# Altium PCB SPEC_A7_Management.PCBDOC (part 2 of 4)
Units mm, origin at the board's own origin, x right, y up, seen from the top; angles counter-clockwise.
Board outline 141.1 x 65.84 mm, 4 copper layers (Top Layer, Layer 1, Layer 2, Bottom Layer), stack 1.566 mm thick; 177 components, 176 nets, 698 pads, 409 vias.
Unrouted connection lines stored in the file: 4.
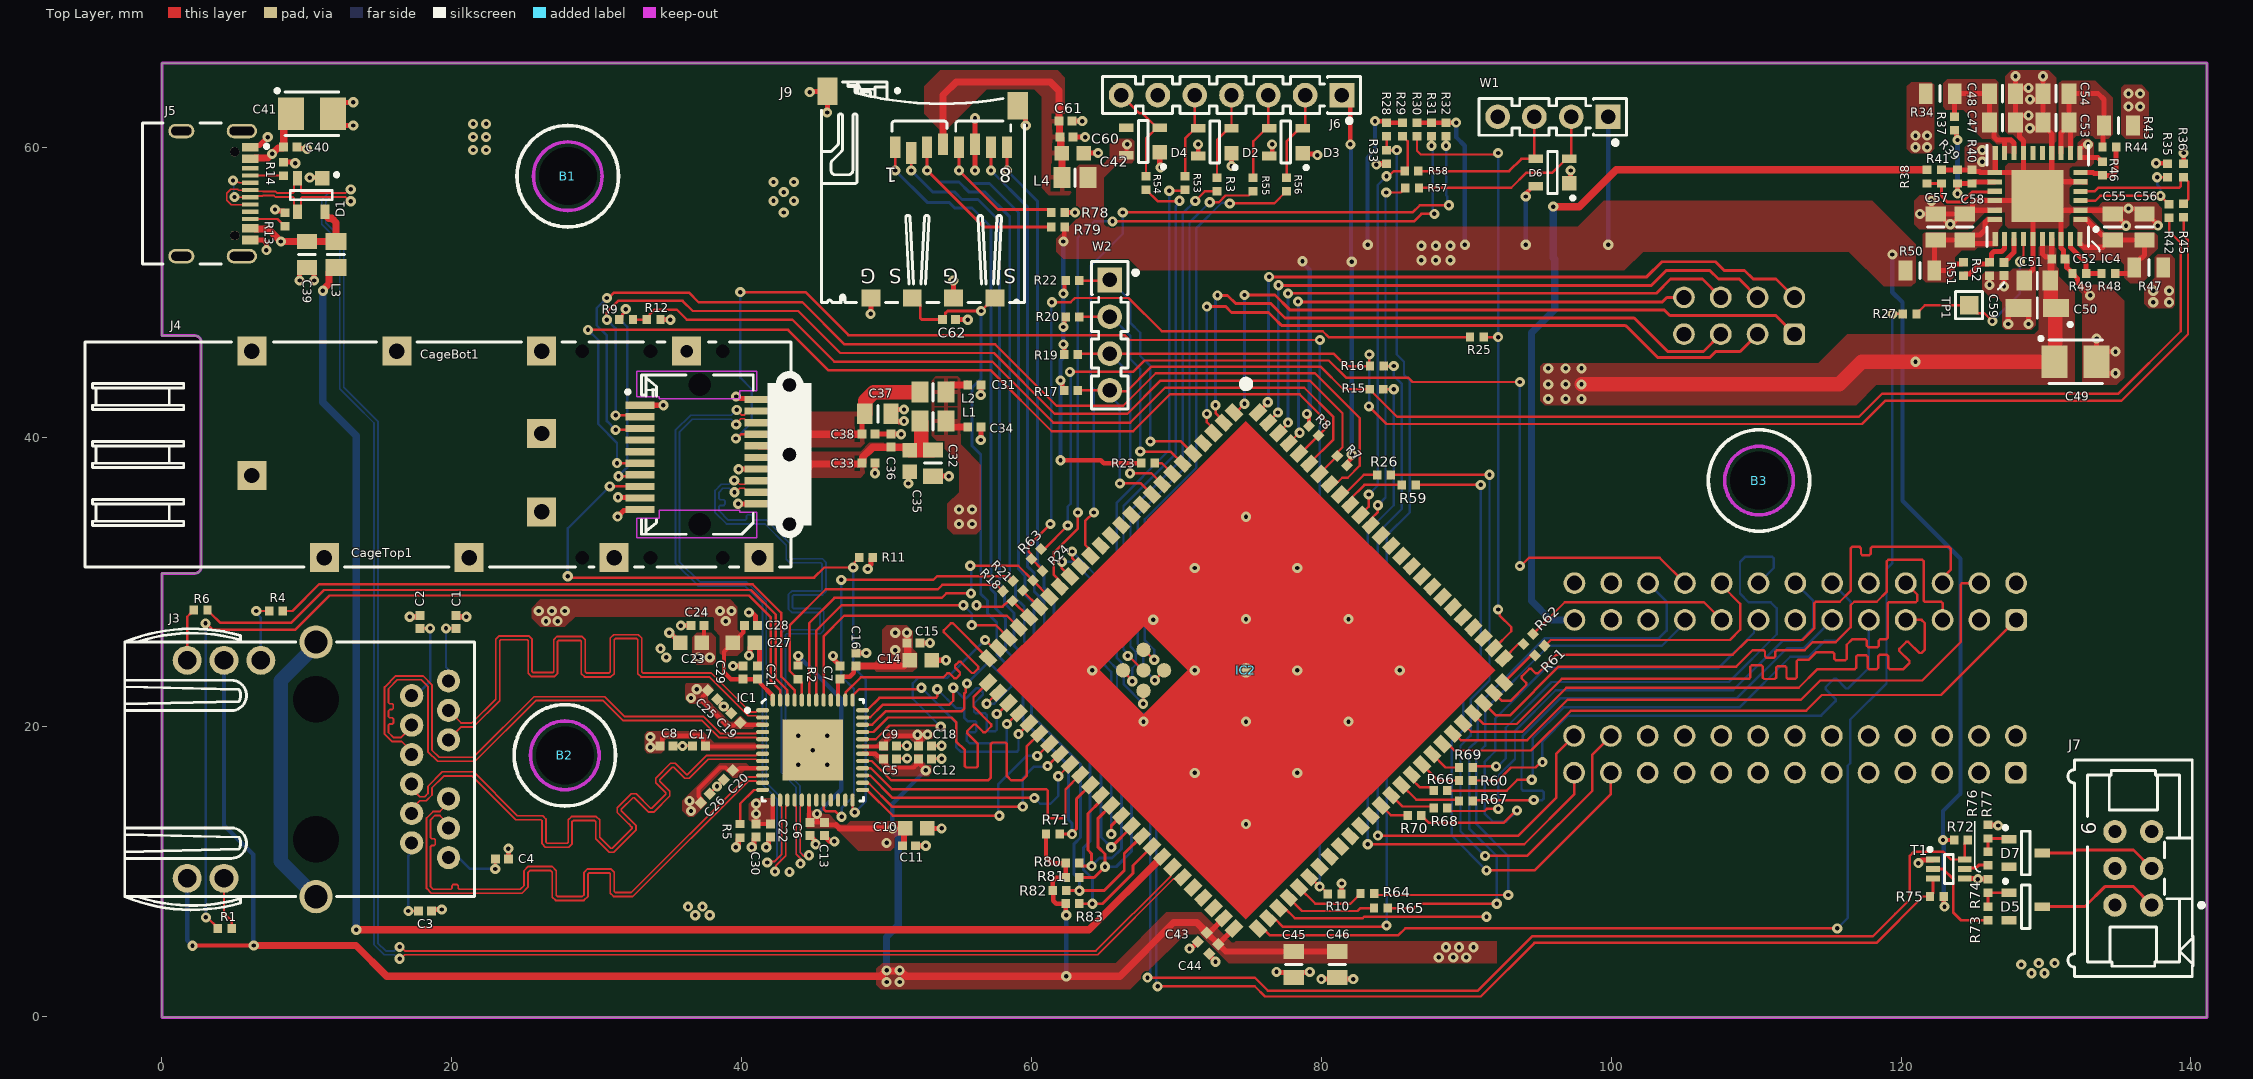
[diagram p0: Top Layer view]

## Part data (continued)
R39 R40 R48: library part R0402_24K_1%_0.0625W_100PPM, "Resistor - 1%", Case=0402, Manufacturer=GENERIC, Manufacturer1 ComponentHeight=0.4mm, Manufacturer1 Example="YAGEO PHYCOMP", Manufacturer1 Part Number=232270672403L, Power=0.0625W, Tolerance=±1%, Author="CERN DEM JLC", Component Type=Standard, CreateDate=03.12.2007, HelpURL=\\cern.ch\dfs\Applications\Altium\Datasheets\R0402_Phycomp_RC0402.pdf, LatestRevisionDate=17.10.2012, Manufacturer Part Number=R0402_24K_1%_0.0625W_100PPM, Mounted=Yes, Part Description="General Purpose Thick Film Chip Resistor", Part Number=R0402_24K_1%_0.0625W_100PPM, Pin Count=2, PressFit=No, Sense=No, SMD=Yes, Socket=No, Status="Not Recommended", TC=±100ppm/°C
R44 R52: library part R0402_15K_1%_0.0625W_100PPM, "Resistor - 1%", Case=0402, Manufacturer=GENERIC, Manufacturer1 ComponentHeight=0.4mm, Manufacturer1 Example=VISHAY, Manufacturer1 Part Number=CRCW040215K0FK, Power=0.0625W, Tolerance=±1%, Author="CERN DEM JMW", Component Type=Standard, CreateDate=06.07.2015, HelpURL="\\cern.ch\dfs\Applications\Altium\Datasheets\R0402_VISHAY_CRCW e3.pdf", LatestRevisionDate=06.07.2015, Manufacturer Part Number=R0402_15K_1%_0.0625W_100PPM, Mounted=Yes, Part Description="General Purpose Thick Film Chip Resistor", Part Number=R0402_15K_1%_0.0625W_100PPM, Pin Count=2, PressFit=No, Sense=No, SMD=Yes, Socket=No, Status=Preferred, TC=±100ppm/°C
R46 R49: library part R0402_7K5_1%_0.0625W_100PPM, "Resistor - 1%", Case=0402, Manufacturer=GENERIC, Manufacturer1 ComponentHeight=0.4mm, Manufacturer1 Example="YAGEO PHYCOMP", Manufacturer1 Part Number=232270677502L, Power=0.0625W, Tolerance=±1%, Author="CERN DEM JLC", Component Type=Standard, CreateDate=03.12.2007, HelpURL=\\cern.ch\dfs\Applications\Altium\Datasheets\R0402_Phycomp_RC0402.pdf, LatestRevisionDate=17.10.2012, Manufacturer Part Number=R0402_7K5_1%_0.0625W_100PPM, Mounted=Yes, Part Description="General Purpose Thick Film Chip Resistor", Part Number=R0402_7K5_1%_0.0625W_100PPM, Pin Count=2, PressFit=No, Sense=No, SMD=Yes, Socket=No, Status="Not Recommended", TC=±100ppm/°C
R60 R66 R67 R68 R69 R70: library part R0402_33R_1%_0.0625W_100PPM, "Resistor - 1%", Case=0402, Manufacturer=GENERIC, Manufacturer1 ComponentHeight=0.4mm, Manufacturer1 Example="YAGEO PHYCOMP", Manufacturer1 Part Number=232270673309L, Power=0.0625W, Tolerance=±1%, Author="CERN DEM JLC", Component Type=Standard, CreateDate=03.12.2007, HelpURL=\\cern.ch\dfs\Applications\Altium\Datasheets\R0402_Phycomp_RC0402.pdf, LatestRevisionDate=17.10.2012, Manufacturer Part Number=R0402_33R_1%_0.0625W_100PPM, Mounted=Yes, Part Description="General Purpose Thick Film Chip Resistor", Part Number=R0402_33R_1%_0.0625W_100PPM, Pin Count=2, PressFit=No, Sense=No, SMD=Yes, Socket=No, Status="Not Recommended", TC=±100ppm/°C
T1: "45V, 100mA Dual NPN General-Purpose Transistor", Case=SOT363, Manufacturer="NXP SEMICONDUCTORS", Author="CERN DEM JMW", Bonding=No, Component Type=Standard, ComponentHeight=1.1mm, CreateDate=10.07.2015, Device=BC847BS, HelpURL=\\cern.ch\dfs\Applications\Altium\Datasheets\BC847BS.pdf, LatestRevisionDate=10.07.2015, Manufacturer Part Number=BC847BS, Mounted=Yes, PackageDescription="SOT363, SC-88, 0.65mm Pitch; 6 Pin, 1.25mm W X 2.00mm L X 1.10mm H body, IPC Medium Density", Part Description="45V 100mA Dual NPN General-Purpose Transistor", Part Number=BC847BS, Pin Count=6, PressFit=No, Sense=No, SMD=Yes, Socket=No
TP1: library part SMD_PAD_1.27X1.27MM, Author="CERN DEM JLC", Component Type="Standard (No BOM)", ComponentHeight=0mm, CreateDate=12.01.2008, Family="Test Point", HelpURL=Undefined, LatestRevisionDate=12.01.2008, Mounted=No, PackageDescription="1.27mm x 1.27mm PCB Copper Area (SMD Test Point)", Part Description="1.27mm x 1.27mm PCB Copper Area (SMD Test Point)", Part Number=SMD_PAD_1.27X1.27MM, Pin Count=1, Sense=No, SMD=Yes, Socket=No, Status=None
W1 W2: library part SAMTEC_HTSW-104-23-L-S, "4 Mini Wire-Wrap Contact Strip Header", Manufacturer=SAMTEC, Manufacturer Part Number=HTSW-104-23-L-S, Author="CERN DEM JLC", Component Type=Standard, ComponentHeight=8.38mm, CreateDate=22/02/2018, Family="Header 4", HelpURL=\\cern.ch\dfs\Applications\Altium\Datasheets\SAMTEC_HTSW-104-23-L-S.pdf, LatestRevisionDate=22/02/2018, Mounted=Yes, Part Description="4 Contacts, Pitch 2.54mm, Single Row  Through Mount Straight Header (Post Lead 5.84mm, Tail Lead 2.92mm, Insulator 2.54mm)", Part Number=SAMTEC_HTSW-104-23-L-S, Pin Count=4, PressFit=No, Sense=No, SMD=No, Socket=No, Status=Preferred, Status Comment="High Temperature"

## Via types
v1: diameter 0.7, hole 0.3, Top Layer to Bottom Layer, tented both sides, 409 vias

## Nets (pads, with @x,y where several pads share a name; then routed paths per layer and width w, separated by ;. In a path a pad name is that pad's centre, name@x,y a point inside that pad or via, vN(x,y) a via of type N, cw(c..) or ccw(c..) an arc to the next point about the centre after c; other vN are vias at no path point)
A7_RXD: IC2.91 R59.2 | length 4.4
  Top Layer w0.166: IC2.91@81.995,35.337 81.995,35.722 82.973,36.7 R59.2@85.56,36.7
A7_TXD: IC2.92 R26.2 | length 3.1
  Top Layer w0.166: IC2.92@81.288,36.045 81.576,36.045 82.931,37.4 R26.2@83.86,37.4
BOOT_MODE: IC2.52 R28.1 R33.2 | length 64.6
  Top Layer w0.166: IC2.52@76.338,6.806 76.751,6.806 77.356,6.2 84.4,6.2 v1(84.5,6.3) ; R28.1@84.5,60.76 R33.2@84.5,59.8 v1(85.2,59.8)
  Bottom Layer w0.166: v1(84.5,6.3) 84.5,33.2 86.1,34.8 86.1,43.9 85.7,44.3 85.7,45.2 85.2,45.7 v1(85.2,59.8)
BOOT_MODE2: IC2.18 R31.1 | length 55.6
  Top Layer w0.166: IC2.18@61.948,29.681 61.948,30.093 61.547,30.495 61.547,32.047 63.2,33.7 v1(63.2,34.8) ; v1(65.586,54.886) 86.386,54.886 86.9,55.4 v1(87.8,55.4) ; v1(87.6,60.1) R31.1@87.6,60.76
  Bottom Layer w0.166: v1(63.2,34.8) 63.2,53.756 64.33,54.886 v1(65.586,54.886) ; v1(87.6,60.1) 87.7,60 87.7,55.5 v1(87.8,55.4)
BOOT_MODE3: IC2.15 R32.1 | length 52.6
  Top Layer w0.166: IC2.15@64.07,31.802 64.07,32.201 63.7,32.57 63.7,34.2 v1(64.3,34.8) ; v1(66.3,55.5) 86.3,55.5 86.8,56 v1(88.8,56) ; v1(88.6,60.1) R32.1@88.6,60.76
  Bottom Layer w0.166: v1(64.3,34.8) 64.3,43.282 64.1,43.482 64.1,51.819 66.3,54.019 v1(66.3,55.5) ; v1(88.6,60.1) 88.616,60.084 88.616,56.682 88.699,56.599 88.699,56.101 v1(88.8,56)
CHASSIS: J3.18 J3.19 | length 19.6
  Bottom Layer w1: J3.18@10.63,8.285 8.2,10.715 8.2,23.2 10.63,25.63 J3.19@10.63,25.865
CONSOLE_RX: IC2.89 R57.1 | length 24.9
  Top Layer w0.166: IC2.89@83.409,33.923 83.409,34.336 83.9,34.827 v1(83.9,35.3) ; v1(84.476,56.876) 85.476,56.876 85.573,56.973 85.593,56.973 85.8,57.18 R57.1@85.8,57.2
  Bottom Layer w0.166: v1(83.9,35.3) 84.424,35.824 84.424,56.824 v1(84.476,56.876)
CONSOLE_TX: IC2.90 R29.1 R58.2 | length 28.2
  Top Layer w0.166: IC2.90@82.702,34.63 83.274,35.202 v1(83.274,36.042) ; v1(84.5,58) 84.641,58 84.994,58.353 R58.2@85.753,58.353 85.96,58.56 85.96,60.4 85.827,60.533 85.827,60.553 85.62,60.76 R29.1@85.6,60.76
  Bottom Layer w0.166: v1(83.274,36.042) 83.889,36.658 83.889,57.39 v1(84.5,58)
DLY2_SE: J1.18
DLY3_SE: J1.17
EN1: IC4.19 R38.1 R41.2 | length 6
  Top Layer w0.2: R38.1@121.8,57.5 R41.2@122.8,57.5 122.8,56.617 123.187,56.23 124.23,56.23 124.9,56.9 126.4,56.9 IC4.19@126.462,56.962
ENET1_INT: IC2.21 R18.1 | length 4.3
  Top Layer w0.166: v1(56.2,28.4) 56.3,28.3 58.007,28.3 58.407,28.7 R18.1@58.7,28.7 59.827,27.573 IC2.21@59.827,27.559
ENET1_MDC: IC1.42 IC2.23 | length 20.2
  Top Layer w0.166: IC1.42@45.15,21.85 45.15,26.65 46.9,28.4 v1(55.3,28.4) ; v1(55.879,27.024) 57.534,27.024 IC2.23@58.413,26.145
  Bottom Layer w0.166: v1(55.3,28.4) 55.879,27.821 v1(55.879,27.024)
ENET1_MDIO: IC1.41 IC2.22 | length 18.8
  Top Layer w0.166: IC1.41@45.65,21.85 45.65,26.25 47.081,27.681 58.291,27.681 IC2.22@59.12,26.852